# Altium PCB ScaleSimulator_Test.PcbDoc
Units mil, origin at the board's own origin, x right, y up, seen from the top; angles counter-clockwise.
Board outline 2300 x 2100 mil, 2 copper layers (Top Layer, Bottom Layer); 16 components, 21 nets, 74 pads, 2 vias.
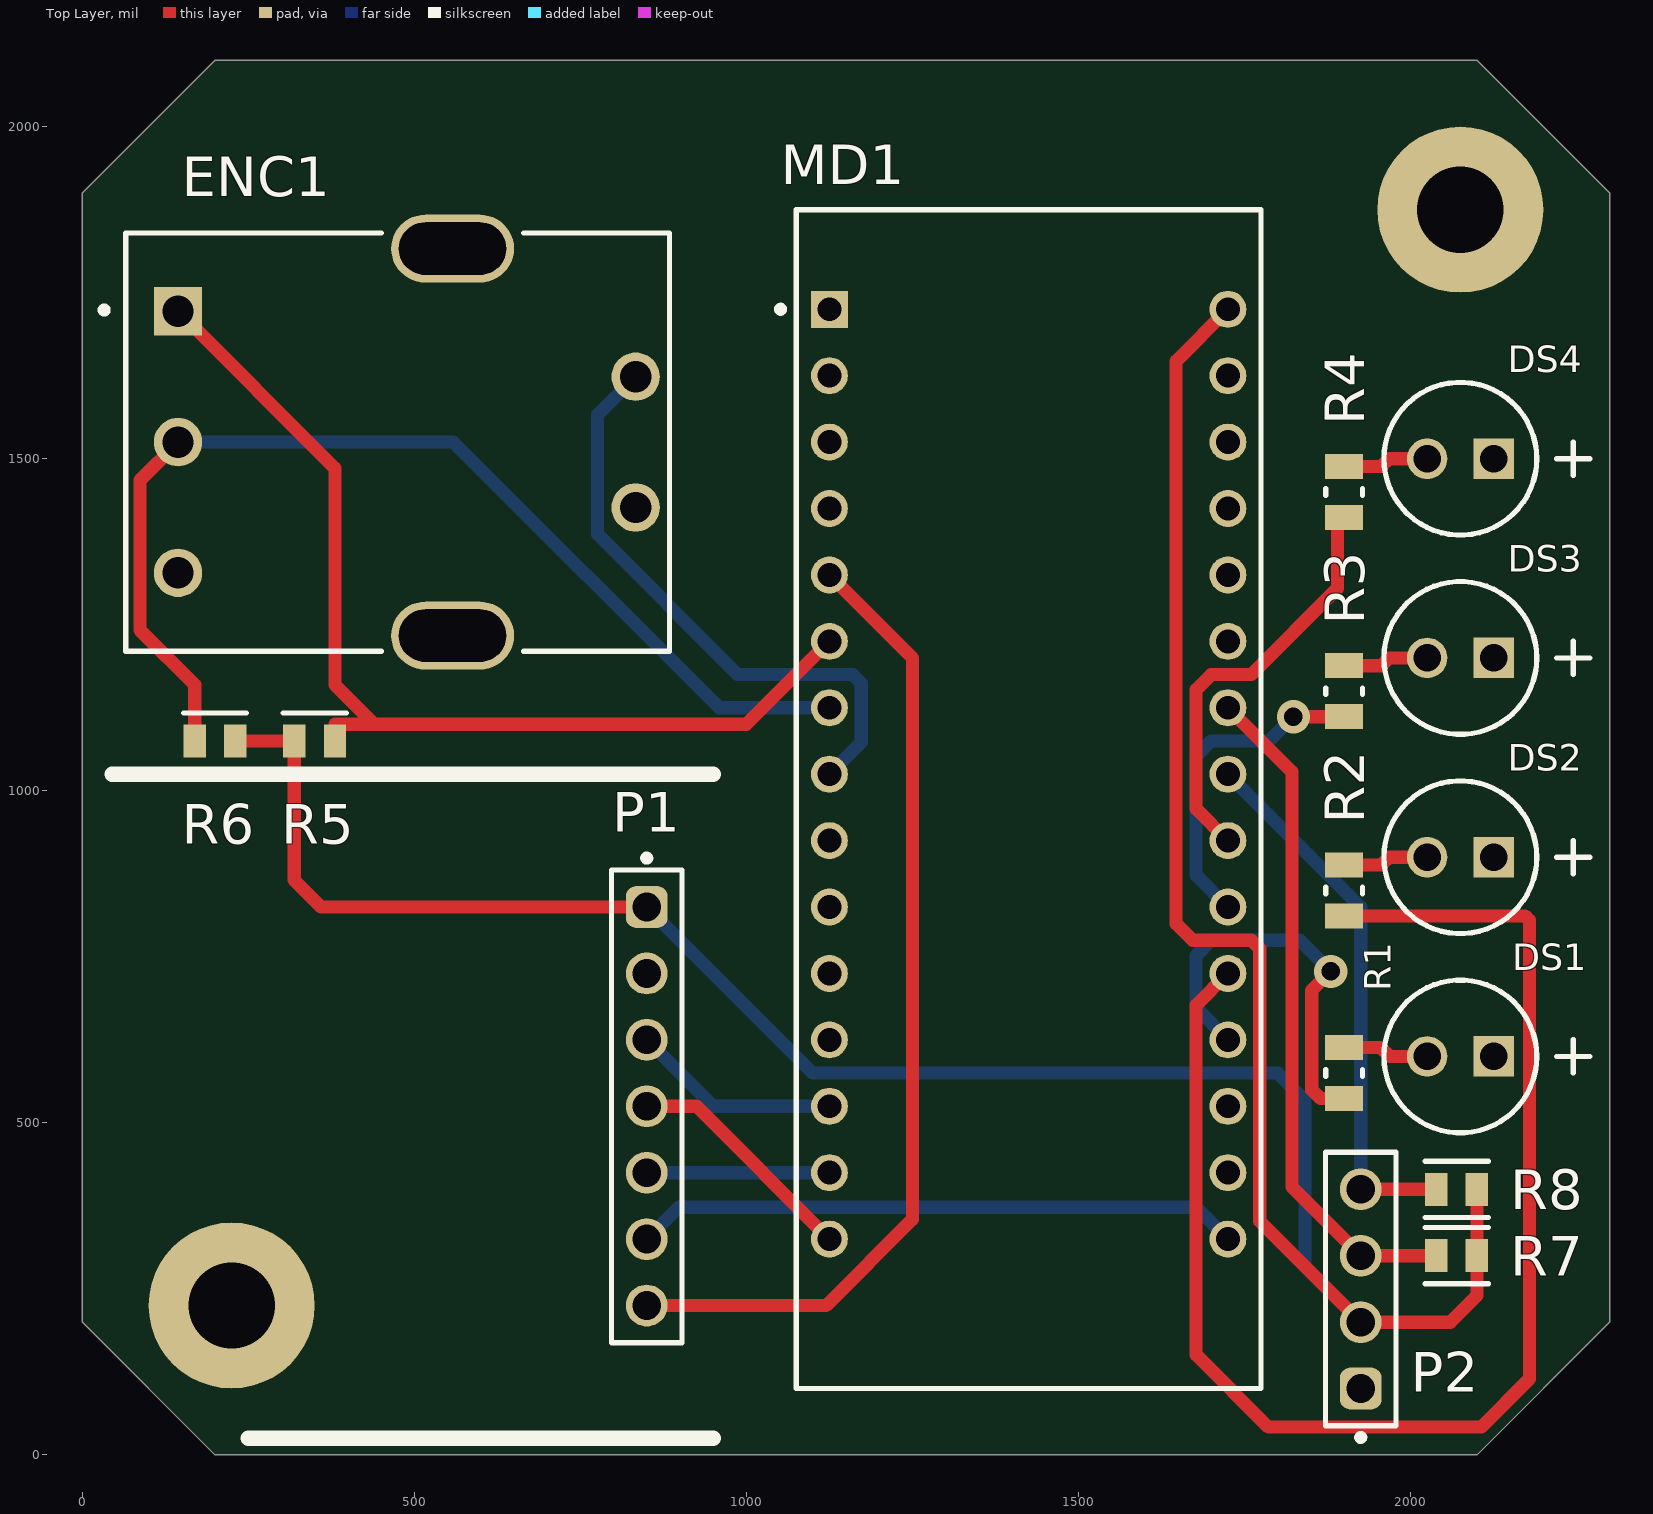
[diagram p0: Top Layer view]
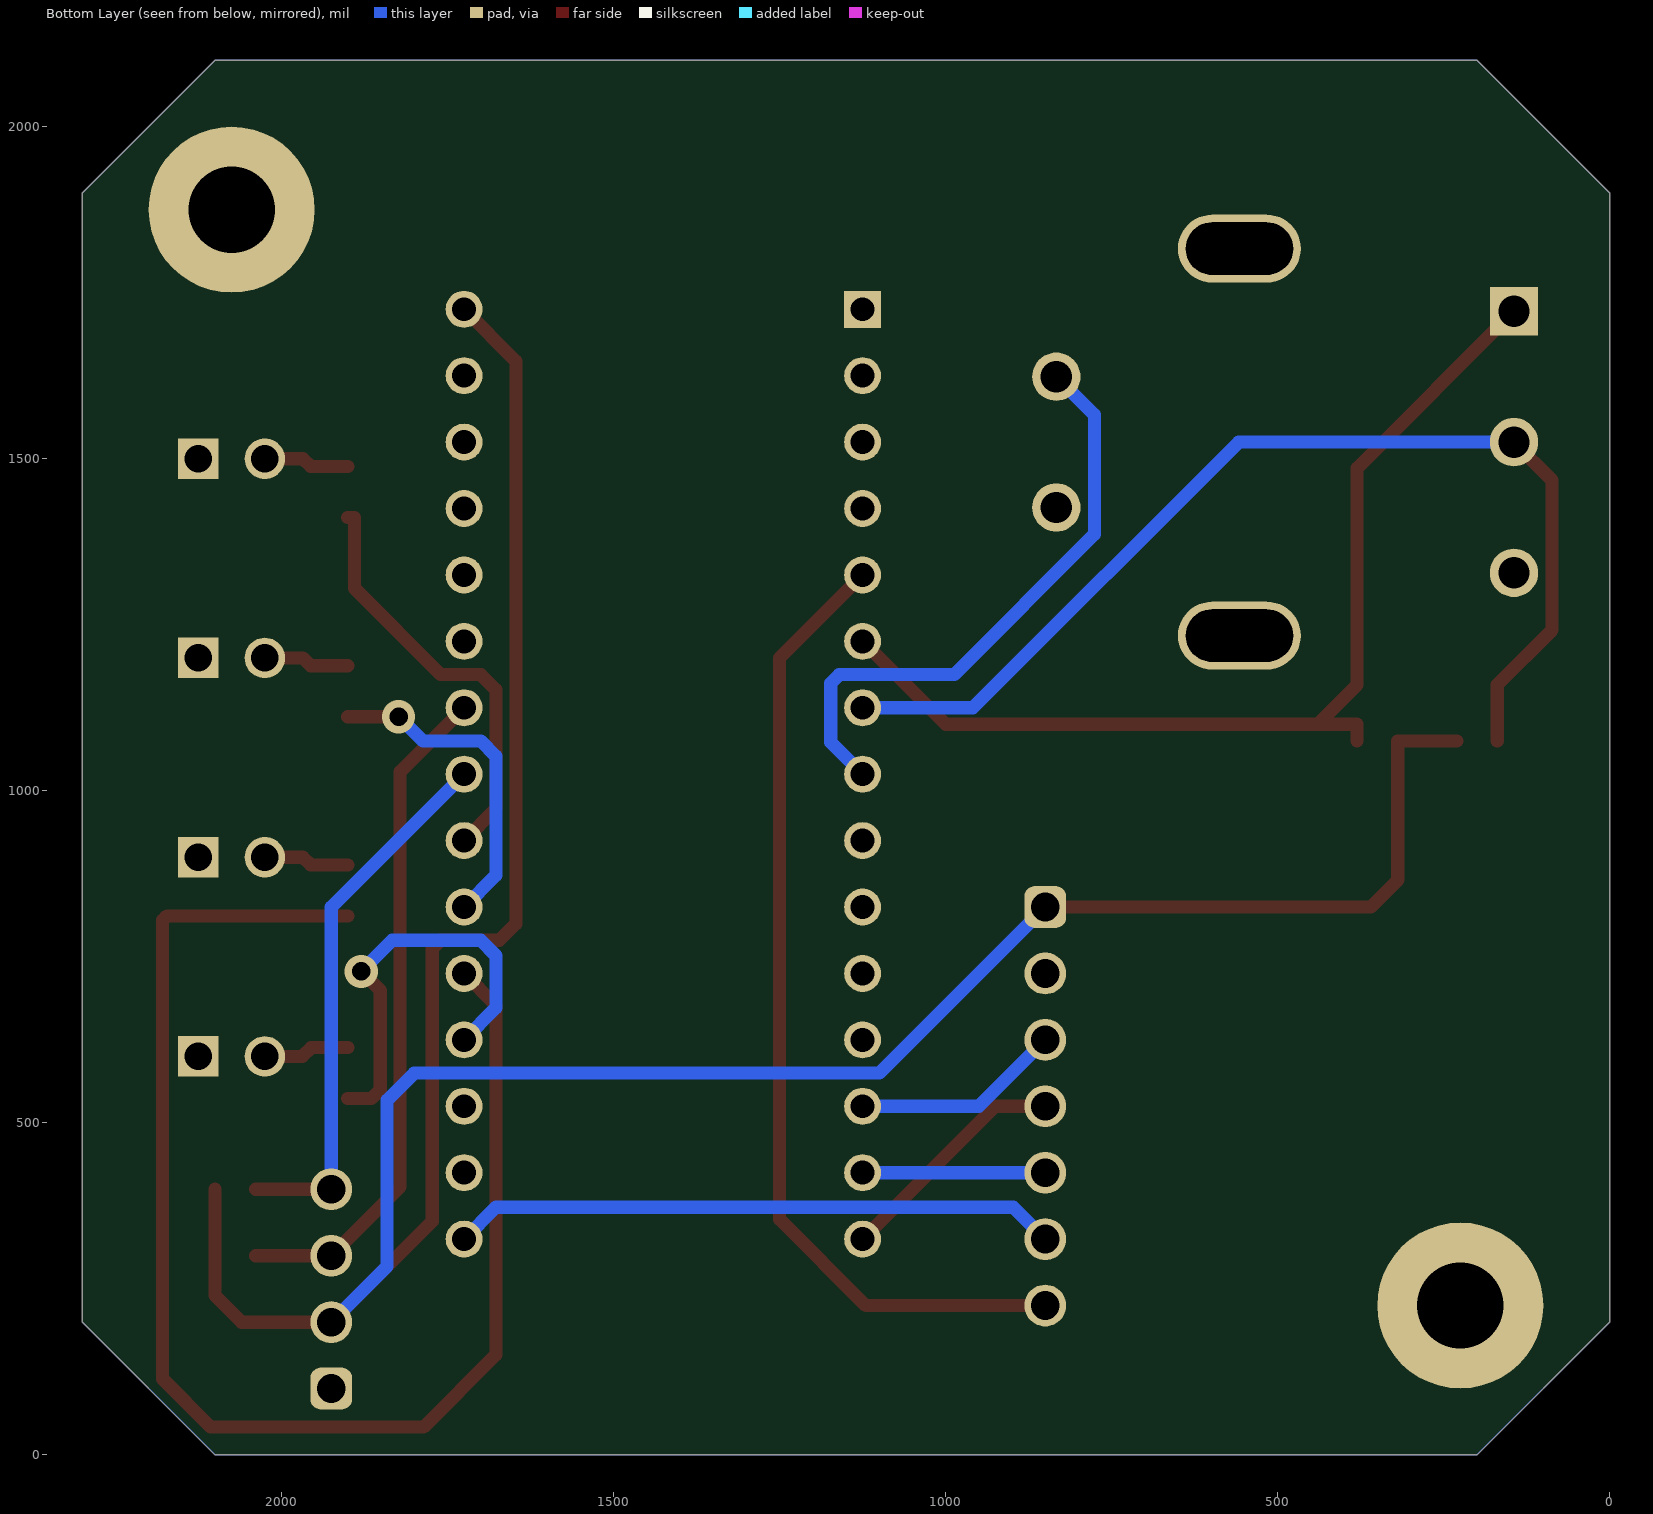
[diagram p1: Bottom Layer view, seen from below]
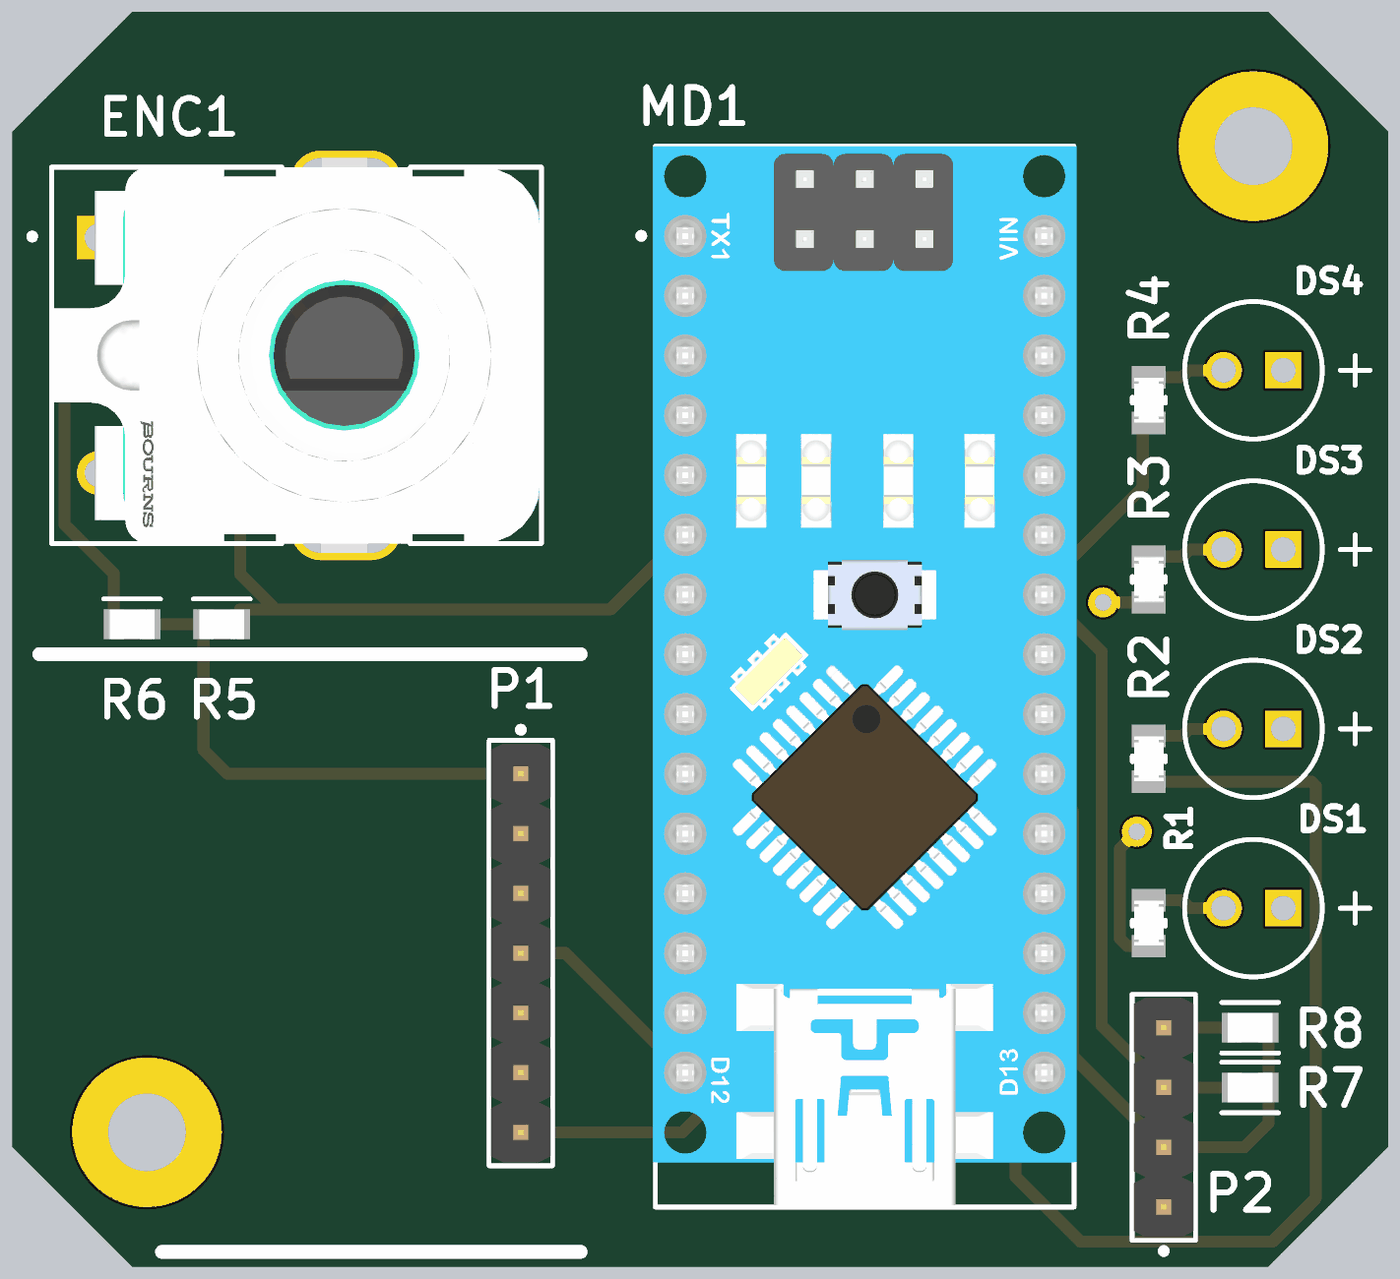
[diagram p2: 3D render of the assembled board from above, using the file's embedded part models]

## Layer stack, top to bottom
Top Solder: solder mask 0.4, Solder Resist, Dk 3.5
Top Layer: signal copper 1.4
Dielectric 1: dielectric 12.6, FR-4, Dk 4.8
Bottom Layer: signal copper 1.4
Bottom Solder: solder mask 0.4, Solder Resist, Dk 3.5

## Board outline
0,1900 200,2100 2100,2100 2300,1900 2300,200 2100,0 200,0 0,200

## Design rules (kind name [scope] priority, off if disabled: settings)
Clearance [All] p1: gap=10 ignorepadtopadclearanceinfootprint=FALSE ismatrix=TRUE
HoleSize [All] p1: absolutevalues=TRUE maxlimit=175 minlimit=1 maxpercent=80.000 minpercent=20.000
PolygonConnect [All] p1: connectstyle=Relief reliefconductorwidth=10 reliefentries=4 polygonreliefangle="90 Angle" airgapwidth=10
RoutingVias [All] p1: holewidth=28 width=50 viastyle="Through Hole" minholewidth=28 minwidth=50 maxholewidth=28 maxwidth=50
SolderMaskExpansion [All] p1: expansion=4 istentingtop=FALSE
Width MaxMinWidth_1 [All] p1: maxlimit=30 minlimit=10 preferedwidth=20 minimp=50.000000 maximp=50.000000 favimp=50.000000
Width [All] p2: maxlimit=10 minlimit=10 preferedwidth=10
29 further rules are at their usual default settings.

## Components (designator, comment, footprint, x,y, rotation, side; value= is the part's Value field where it differs from the comment)
DS1 "HLMP-3301" AVAG-HLMP-3301-2 2125,600 r180 top
DS2 "HLMP-3301" AVAG-HLMP-3301-2 2125,900 r180 top
DS3 "HLMP-3301" AVAG-HLMP-3301-2 2125,1200 r180 top
DS4 "HLMP-3301" AVAG-HLMP-3301-2 2125,1500 r180 top
ENC1 "PEC16-4115F-S0012" FP-PEC16-4115F-S0012-MFG 475,1525 r270 top
MD1 "A000005" FP-A000005-MFG 1425,987.5 r0 top
P1 "61300711121" 61300711121 850,525 r270 top
P2 "61300411121" 61300411121 1925,250 r90 top
R1 "CRCW0805330RFKEA" FP-CRCW0805-e3-MFG 1900,575 r270 top
R2 "CRCW0805330RFKEA" FP-CRCW0805-e3-MFG 1900,850 r270 top
R3 "CRCW0805330RFKEA" FP-CRCW0805-e3-MFG 1900,1150 r270 top
R4 "CRCW0805330RFKEA" FP-CRCW0805-e3-MFG 1900,1450 r90 top
R5 "CR0805-FX-1002GLF" FP-CR0805-IPC_C 350,1075 r180 top
R6 "CR0805-FX-1002GLF" FP-CR0805-IPC_C 200,1075 r0 top
R7 "CR0805-FX-1002GLF" FP-CR0805-IPC_C 2069.41,300 r0 top
R8 "CR0805-FX-1002GLF" FP-CR0805-IPC_C 2069.41,400 r0 top

## Footprints (in the part's own frame and the unit in brackets; to place one, negate y for a bottom-side part, rotate by r counter-clockwise, add the part's x,y. Pads: shape width x height; smd on the part's side, far side on the other; paste and mask are expansions set on the pad)
61300411121 [mm] "Pin Header, pitch 2.54 mm, THT, Vertical, single row, 4p"
  rrect50% 1.6x1.6 hole 1.1: 1(-3.81,0)
  round 1.6 hole 1.1: 2(-1.27,0) 3(1.27,0) 4(3.81,0)
  silkscreen extent -5.8,-1.34 5.23,1.34, body extent -5.08,-1.27 5.08,1.27, height 8.57
61300711121 [mm] "Pin Header, pitch 2.54 mm, THT, Vertical, single row, 7p"
  rrect50% 1.6x1.6 hole 1.1: 1(-7.62,0)
  round 1.6 hole 1.1: 2(-5.08,0) 3(-2.54,0) 4(0,0) 5(2.54,0) 6(5.08,0) 7(7.62,0)
  silkscreen extent -9.61,-1.34 9.04,1.34, body extent -8.89,-1.27 8.89,1.27, height 8.57
AVAG-HLMP-3301-2 [mm] "THD, 2-Leads, Body Dia 5.85mm"
  rect 1.55x1.55 hole 1.05: 1(0,0)
  round 1.55 hole 1.05: 2(2.54,0)
  silkscreen extent -3.68,-2.92 4.19,2.92
FP-A000005-MFG [mil]
  rect 55.67x55.67 hole 35.98 paste-99999 mask+0: 1(-300,737.5)
  round 55.67 hole 35.98 paste-99999 mask+0: 2(-300,637.5) 3(-300,537.5) 4(-300,437.5) 5(-300,337.5) 6(-300,237.5) 7(-300,137.5) 8(-300,37.5) 9(-300,-62.5) 10(-300,-162.5) 11(-300,-262.5) 12(-300,-362.5) 13(-300,-462.5) 14(-300,-562.5) 15(-300,-662.5) 16(300,-662.5) 17(300,-562.5) 18(300,-462.5) 19(300,-362.5) 20(300,-262.5) 21(300,-162.5) 22(300,-62.5) 23(300,37.5) 24(300,137.5) 25(300,237.5) 26(300,337.5) 27(300,437.5) 28(300,537.5) 29(300,637.5) 30(300,737.5)
  silkscreen extent -379,-888 350,888, body extent -354,-891 354,891, height 10
FP-CR0805-IPC_C [mil]
  rect 33.79x49.69 smd paste+0 mask+0: 1(-30.59,0) 2(30.59,0)
  silkscreen extent -47,-42 47,42, body extent -51,-31 51,31, height 10
FP-CRCW0805-e3-MFG [mm]
  rect 0.95x1.45 smd paste+0 mask+0: 1(-0.975,0) 2(0.975,0)
  silkscreen extent -0.13,-0.7 0.13,0.7, body extent -1.55,-0.82 1.55,0.82, height 0.25
FP-PEC16-4115F-S0012-MFG [mm]
  rrect100% 2.6x4.7 hole 4.1 slot 2 at 0 deg paste-2539.97 mask+0: 1(-7.4,2.1) 2(7.4,2.1)
  rect 1.85x1.85 hole 1.2 paste-2539.97 mask+0: A(-5,-8.4)
  round 1.85 hole 1.2 paste-2539.97 mask+0: B(0,-8.4) C(5,-8.4) D(-2.5,9.1) E(2.5,9.1)
  silkscreen extent -8,-11.35 8,10.4, body extent -8.8,-10.5 8.8,10.5, height 0.25

## Part data
DS1 DS2 DS3 DS4: library part CMP-2000-06411-1, "T-1 3/4 (5 mm) Diffused LED Lamp, 1.9 V, -40 to 100 degC, 2-Pin THD, RoHS, Bulk", Emitting Color=Red, Forward Current=25mA, Forward Voltage=2.4V, Manufacturer=Avago, Operating Temp Range=-40Cto100C, Operating Temperature Classification=Industrial, Package Description="2-Pin Through Hole LED, Dia 5.85 mm", Package Type=T-13/4, Power Dissipation=85W, Reverse Voltage=5V, Test Current (It)=10mA, Chip Material=GaP, Datasheet URL=http://www.avagotech.com/docs/AV02-1558EN, Datasheet Version=03/2015, DELETED=Compliant, Dominant Wave Length=626nm, High Brightness=No, Lens Dimensions=5.08x5.08x8.3mm, Lens Type=ColoredDiffused, Lum Intensity=5.4mcd, Luminous Intensity=5.4mcd, Main Category=StandardLED, Manufacturer URL=http://www.avagotech.com/, Mounting=ThroughHole, Mounting Technology=ThroughHole, Number of  Elements=1, Package Reference=HLMP-3301, Packaging=TapeandReel, Peak Wavelength=635nm, Pin Count=2, Product Depth (mm)=6.1mm, Product Height (mm)=9.19mm, Product Length (mm)=6.1mm, Rad Hardened=No, Shape Type=Circular, Type=Uni-Color, Viewing Angle=60deg
ENC1: library part CMP-07421-000056-1, "ROTARY ENCODER MECHANICAL 12PPR", Max Operating Temperature=70°C, Min Operating Temperature=-30°C, Operating Supply Voltage=5V, Package Quantity=50, Built in Switch=Yes, Detent=Yes, Encoder Type=Mechanical, Height=17.3mm, Length=23mm, Mount="Through Hole", Number of Channels=2, Orientation=Vertical, Output Type=Quadrature, Pulses per Revolution=12, RoHS Compliant=Yes, Series=PEC16, Termination="PC Pin", Width=16mm
MD1: library part CMP-189986-000002-1, "ARDUINO NANO ATMEGA328 EVAL BRD", Operating Supply Voltage=12V, Package Quantity=50, Core Architecture=AVR, Data Bus Width=8b, Evaluation Kit=Yes, Height=0.25inch, Interface=I2C, Length=7inch, Number of Bits=8, Packaging=Bulk, REACH SVHC="No SVHC", Series="AVR® ATmega", Weight=0.358383oz, Width=5inch
P1: library part CMP-1502-01074-3, Color=Black, Contact Resistance=20mΩ, Current Rating=3A, Operating Supply Voltage=250V, Connector Type="Male Pin", Contact Material=Copper, Contact Mating Length=5.9944mm, Contact Plating=Gold, Gender=Male, Lead Pitch=2.54mm, Mount="Through Hole", NexarPartId=32855531, Number of Contacts=7, Number of Pins=7, Number of Positions=7, Number of Rows=1, Orientation=Vertical, Packaging=Bulk, Pitch=2.54mm, REACH SVHC=Unknown, RoHS=Compliant, Termination=Solder
P2: library part CMP-1502-01064-3, Color=Black, Contact Resistance=20mΩ, Current Rating=3A, Max Operating Temperature=105°C, Min Operating Temperature=-40°C, Operating Supply Voltage=250V, Connector Type="Male Pin", Contact Material=Copper, Contact Mating Length=5.9944mm, Contact Plating=Gold, Gender=Male, Height=8.89mm, Lead Free="Lead Free", Lead Pitch=2.54mm, Mount="Through Hole", NexarPartId=32855522, Number of Contacts=4, Number of Pins=4, Number of Positions=4, Number of Rows=1, Orientation=Vertical, Packaging=Bulk, Pitch=2.54mm, REACH SVHC=Unknown, RoHS=Compliant, Termination=Solder, Voltage Rating=250V
R1 R2 R3 R4: library part CMP-2001-03823-2, "RES Thick Film, 330Ω, 1%, 0.125W, 100ppm/°C, 0805", Case Code (Imperial)=0805, Case Code (Metric)=2012, Max Operating Temperature=155°C, Max Power Dissipation=125mW, Min Operating Temperature=-55°C, Package Quantity=10, Resistance=330R, Temperature Coefficient=100ppm/°C, Tolerance=1%, Voltage Rating=150V, Case/Package=0805, Composition="Thick Film", Contact Plating=Tin, Depth=1.25mm, Features="Automotive AEC-Q200", Height=0.02inch, Lead Free="Lead Free", Length=2mm, Military Standard=Not, Mount="Surface Mount", Number of Terminations=2, Packaging="Tape and Reel", Power Rating=125mW, Termination=SMD/SMT, Voltage Rating (DC)=150V, Weight=0.000194oz, Width=0.049inch
R5 R6 R7 R8: library part CMP-07231-006769-1, "Thick Film Chip Resistors 0805 10kΩ 0.125W 1% 100ppm/°C", Case Code (Imperial)=0805, Case Code (Metric)=2012, Max Operating Temperature=155°C, Max Power Dissipation=125mW, Min Operating Temperature=-55°C, Resistance=10kR, Resistance Tolerance=1%, Resistor Type="Thick Film", Temperature Coefficient=100ppm/°C, Voltage Rating=150V, Case/Package=0805, Construction=Rectangular, Contact Plating=Tin, Depth=1.25mm, Features="Moisture Resistant", Height=0.024inch, Length=2mm, Military Standard=Not, Mount="Surface Mount", Number of Pins=2, Number of Terminations=2, Packaging="Tape and Reel", Power Rating=125mW, Radiation Hardening=No, REACH SVHC="No SVHC", Series=CR0805, Technology="THICK FILM", Termination=SMD/SMT, Thickness=508um, Tolerance=1%, Voltage Rating (DC)=150V, Width=0.049inch

## Free pads (board coordinates)
  round 250 hole 130: 6(225,225) 6(2075,1875)

## Via types
v1: diameter 50, hole 28, Top Layer to Bottom Layer, 2 vias

## Nets (pads, with @x,y where several pads share a name; then routed paths per layer and width w, separated by ;. In a path a pad name is that pad's centre, name@x,y a point inside that pad or via, vN(x,y) a via of type N, cw(c..) or ccw(c..) an arc to the next point about the centre after c; other vN are vias at no path point)
+5: MD1.30 P1.1 P2.2 R5.2 R6.2 R7.2 R8.2 | length 4401.5
  Top Layer w20: R6.2 R5.2 319.41,865.59 360,825 P1.1 ; MD1.30 1647,1647 1647,800 1672,775 1760,775 1773,762 1773,352 P2.2 2060,200 2100,240 R7.2 R8.2
  Bottom Layer w20: P1.1 1100,575 1800,575 1841,534 1841,284 P2.2
+12: MD1.27
GND: DS1.1 DS2.1 DS3.1 DS4.1 ENC1.C ENC1.E MD1.4 MD1.29 P1.2 P2.1
NetDS1_2: DS1.2 R1.1 | length 130.5
  Top Layer w20: R1.1 1955,613.39 1968.39,600 DS1.2
NetDS2_2: DS2.2 R2.1 | length 129.8
  Top Layer w20: R2.1 1956,888.39 1967.61,900 DS2.2
NetDS3_2: DS3.2 R3.1 | length 129.8
  Top Layer w20: R3.1 1956,1188.39 1967.61,1200 DS3.2
NetDS4_2: DS4.2 R4.2 | length 129.8
  Top Layer w20: R4.2 1956,1488.39 1967.61,1500 DS4.2
NetENC1_A: ENC1.A MD1.6 R5.1 | length 1565.5
  Top Layer w20: ENC1.A 380.59,1485.55 380.59,1159.41 440,1100 ; R5.1 380.59,1100 440,1100 ; MD1.6 1000,1100 440,1100
NetENC1_B: ENC1.B MD1.7 R6.1 | length 1654.3
  Top Layer w20: ENC1.B 87,1467.71 87,1242 169.41,1159.59 R6.1
  Bottom Layer w20: ENC1.B 559,1525 959,1125 MD1.7
NetENC1_D: ENC1.D MD1.8 | length 907.8
  Bottom Layer w20: ENC1.D 776,1566.16 776,1386 987,1175 1160,1175 1173,1162 1173,1073 MD1.8
NetMD1_5: MD1.5 P1.7 | length 1475.6
  Top Layer w20: P1.7 1120,225 1250,355 1250,1200 MD1.5
NetMD1_13: MD1.13 P1.3 | length 316.4
  Bottom Layer w20: P1.3 950,525 MD1.13
NetMD1_14: MD1.14 P1.5 | length 275
  Bottom Layer w20: P1.5 MD1.14
NetMD1_15: MD1.15 P1.4 | length 357.8
  Top Layer w20: P1.4 925,525 MD1.15
NetMD1_16: MD1.16 P1.6 | length 914.8
  Bottom Layer w20: P1.6 898,373 1677,373 MD1.16
NetMD1_19: MD1.19 R1.2 | length 622.8
  Top Layer w20: v1(1880,728) 1851.46,699.46 1851.46,550 1864.84,536.61 R1.2
  Bottom Layer w20: MD1.19 1677,673 1677,752 1700,775 1833,775 v1(1880,728)
NetMD1_20: MD1.20 R2.2 | length 2143.4
  Top Layer w20: MD1.20 1677,677 1677,151 1786,42 2106.64,42 2179,114.36 2179,805 2172.39,811.61 R2.2
NetMD1_21: MD1.21 R3.2 | length 494.6
  Top Layer w20: v1(1823.61,1111.61) R3.2
  Bottom Layer w20: MD1.21 1677,873 1677,1052 1700,1075 1787,1075 v1(1823.61,1111.61)
NetMD1_22: MD1.22 R4.1 | length 639.9
  Top Layer w20: MD1.22 1677,973 1677,1152 1700,1175 1760,1175 1890,1305 1890,1411.61 R4.1
NetMD1_23: MD1.23 P2.4 R8.1 | length 821.7
  Top Layer w20: P2.4 R8.1
  Bottom Layer w20: MD1.23 1925,825 P2.4
NetMD1_24: MD1.24 P2.3 R7.1 | length 1021.7
  Top Layer w20: MD1.24 1821.46,1028.54 1821.46,403.54 P2.3 R7.1
pads on no net: ENC1.1 ENC1.2 MD1.1 MD1.2 MD1.3 MD1.9 MD1.10 MD1.11 MD1.12 MD1.17 MD1.18 MD1.25 MD1.26 MD1.28

## Polygon pours and split planes (outlines as drawn)
GND on Bottom Layer "NONET_L02_P002" (solid, shelved, pour order 2): 0,1900 200,2100 2100,2100 2300,1900 2300,200 2100,0 200,0 0,200

## Silkscreen, mask and mechanical layers (free items; w line width, h text height)
Top Overlay:
  lines w23: 45,1025 950,1025 ; 250,25 950,25